# EAGLE board Phantom.Kernal.Board.V03 (EAGLE 8.3.1)
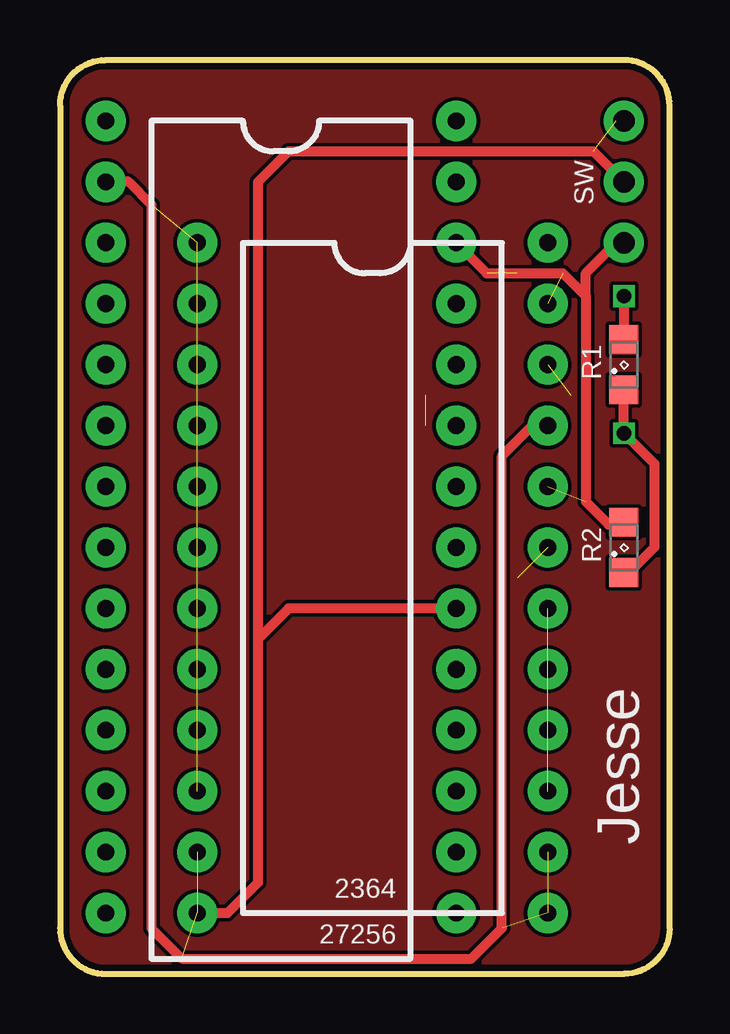
[diagram p0: board, top side]
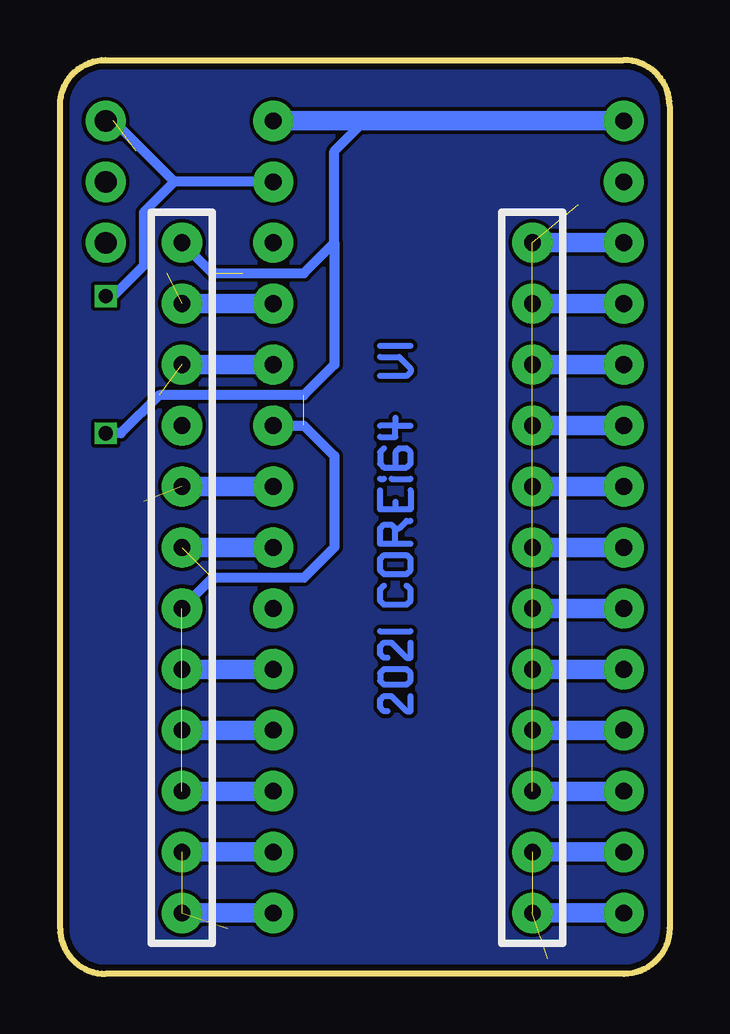
[diagram p1: board, bottom side, seen from below]

Size 25.4 x 38.1 mm. Coordinates in mm from the lower left corner, seen from the top.
Outline: 1.91,0 23.5,0 arc90 25.4,1.91 25.4,36.2 arc90 23.5,38.1 1.91,38.1 arc90 0,36.2 0,1.91 arc90 1.91,0
Copper layers (1*16): Top 0.035mm / dielectric 1.5mm / Bottom 0.035mm
Design rules "Elecrow_2-layer_eagle_rule *": minimum track width 6mil, minimum drill 12mil, track to track 6mil, track to pad 6mil, pad to pad 6mil, via to via 6mil, smd to smd 0mil, copper to edge 10mil, drill to drill 10mil, minimum pad ring 10mil, minimum via ring 6mil, stop-mask expansion 2mil, vias tented up to drill 0mil, thermal gap 10mil

## Footprints (pad centres in the part's own frame; a part is rotated, then mirrored left to right if it is on the bottom)
SML0805 = smd 1.2 x 1.2: A 1.05,0; C -1.05,0

## Placement (x,y rotation side)
E$2  [SML0805]  23.5,25.4 90 top
E$3  [SML0805]  23.5,17.78 90 top

## Library data of the parts
E$2 E$3 = led

## Tracks (layer width: path | path; a pad name or v marks a point on that pad's centre or on a via)
N$1
  Bottom 0.254: 11.75,13.18 11.91,13.18 12.06,13.34 12.06,13.65 11.91,13.81 11.59,13.81 10.95,13.18 10.79,13.18 10.79,13.81
N$2
  Bottom 0.254: 12.06,26.19 10.79,26.19
N$9
  Bottom 0.254: 10.95,16.19 10.79,16.03 10.79,15.56 10.95,15.4 11.91,15.4 12.06,15.56 12.06,16.03 11.91,16.19
N$10
  Bottom 0.254: 11.91,16.67 10.95,16.67 10.79,16.83 10.79,17.3 10.95,17.46 11.91,17.46 12.06,17.3 12.06,16.83 11.91,16.67
N$11
  Bottom 0.254: 11.43,17.94 12.06,17.94 12.06,18.57 11.91,18.73 11.59,18.73 11.43,18.57 | 11.43,17.94 10.79,17.94 | 11.43,17.94 11.43,18.57 | 11.43,18.57 11.27,18.57 10.95,18.89 10.79,18.89
N$12
  Bottom 0.254: 10.79,20.16 10.79,19.37 11.43,19.37 | 11.43,19.68 11.43,19.37 | 11.43,19.37 12.06,19.37 12.06,20.16
N$13
  Bottom 0.254: 11.59,20.64 10.79,20.64
N$14
  Bottom 0.254: 12.06,20.64 11.91,20.64
N$15
  Bottom 0.254: 11.43,21.27 11.43,21.75 11.27,21.91 10.95,21.91 10.79,21.75 10.79,21.27 10.95,21.11 11.91,21.11 12.06,21.27 12.06,21.75 11.91,21.91
N$16
  Bottom 0.254: 12.06,22.38 11.43,22.38 11.43,22.86 | 11.43,23.18 11.43,22.86 | 11.43,22.86 12.06,22.86 | 11.43,22.86 10.79,22.86
N$17
  Bottom 0.254: 11.75,10.95 11.91,10.95 12.06,11.11 12.06,11.43 11.91,11.59 11.59,11.59 10.95,10.95 10.79,10.95 10.79,11.59
N$18
  Bottom 0.254: 11.91,12.06 10.95,12.06 10.79,12.22 10.79,12.54 10.95,12.7 11.91,12.7 12.06,12.54 12.06,12.22 11.91,12.06
N$19
  Bottom 0.254: 12.06,14.29 10.79,14.29
S$1
  pour Bottom: 1.91,38.1 23.5,38.1 arc-90 25.4,36.2 25.4,1.91 arc-90 23.5,0 1.91,0 arc-90 0,1.91 0,36.2 arc-90
S$2  (via drill 0.6, 0.7 pad 1.68, 0.9 pad 1.68)  (15 unrouted)
  Top 0.406: v5.71,2.54 6.99,2.54 8.26,3.81 8.26,13.97 | 8.26,13.97 8.26,33.02 9.53,34.29 22.23,34.29 v23.5,33.02 | v16.51,15.24 9.53,15.24 8.26,13.97 | v20.32,22.86 19.68,22.86 18.41,21.59 18.41,1.91 17.14,0.64 5.08,0.64 3.81,1.91 3.81,32.07 2.86,33.02 v1.91,33.02 | v23.5,28.26 23.5,26.35
  Bottom 0.406: v16.51,33.02 20.64,33.02 | 20.64,33.02 21.91,31.75 21.91,29.53 23.18,28.26 v23.5,28.26 | 20.64,33.02 23.18,35.56 v23.5,35.56
  Bottom 0.813: v16.51,5.08 v20.32,5.08 | v16.51,2.54 v20.32,2.54 | v1.91,30.48 v5.71,30.48 | v1.91,27.94 v5.71,27.94 | v1.91,25.4 v5.71,25.4 | v1.91,22.86 v5.71,22.86 | v1.91,20.32 v5.71,20.32 | v1.91,17.78 v5.71,17.78 | v1.91,15.24 v5.71,15.24 | v1.91,12.7 v5.71,12.7 | v1.91,10.16 v5.71,10.16 | v1.91,7.62 v5.71,7.62 | v1.91,5.08 v5.71,5.08 | v1.91,2.54 v5.71,2.54
S$3
  pour Top: 0,36.2 arc-90 1.91,38.1 23.5,38.1 arc-90 25.4,36.2 25.4,1.91 arc-90 23.5,0 1.91,0 arc-90 0,1.91
S$4  (via drill 0.6, 0.7 pad 1.68, 0.9 pad 1.68)  (9 unrouted)
  Top 0.406: 23.5,18.73 22.86,18.73 21.91,19.68 21.91,28.26 | v23.5,30.48 23.18,30.48 21.91,29.21 21.91,28.26 | 21.91,28.26 20.95,29.21 17.78,29.21 v16.51,30.48 | 23.5,24.13 v23.5,22.54 24.77,21.27 24.77,17.78 23.5,16.51
  Bottom 0.406: v20.32,30.48 19.05,29.21 15.24,29.21 13.97,30.48 | 12.7,35.56 13.97,34.29 13.97,30.48 | 13.97,30.48 13.97,25.4 15.24,24.13 21.27,24.13 22.86,22.54 v23.5,22.54 | v16.51,22.86 15.24,22.86 13.97,21.59 13.97,17.78 15.24,16.51 19.05,16.51 v20.32,15.24
  Bottom 0.813: v16.51,20.32 v20.32,20.32 | v16.51,27.94 v20.32,27.94 | v1.91,35.56 12.7,35.56 v16.51,35.56 | v16.51,25.4 v20.32,25.4 | v16.51,17.78 v20.32,17.78 | v16.51,12.7 v20.32,12.7 | v16.51,10.16 v20.32,10.16 | v16.51,7.62 v20.32,7.62
S$32
  Bottom 0.254: 12.06,25.72 11.27,25.72 10.79,25.24 10.79,25.08 10.95,24.92 12.06,24.92

## Text on the board
tPlace: SW | R1 | R2 | Jesse | 2364 | 27256